# EAGLE board ProjetoGenius (EAGLE 9.7.0)

Size 92.95 x 123.7 mm. Coordinates in mm from the lower left corner, seen from the top.
Outline: 0,0 92.95,0 92.95,123.7 0,123.7 0,0
Copper layers (1*16): Top 0.035mm / dielectric 1.5mm / Bottom 0.035mm
Design rules "default": minimum track width 6mil, minimum drill 0.35mm, track to track 6mil, track to pad 6mil, pad to pad 6mil, via to via 6mil, smd to smd 6mil, copper to edge 40mil, drill to drill 6mil, minimum pad ring 10mil, minimum via ring 8mil, stop-mask expansion 4mil, vias tented up to drill 0mil, thermal gap 10mil

## Footprints (pad centres in the part's own frame; a part is rotated, then mirrored left to right if it is on the bottom)
LEDRD254W60D565H860B = drill 0.981 pad 1.581: 1 -1.27,0; 2 1.27,0
LEDRD254W60D565H860B_B = drill 0.981 pad 1.581: 1 -1.27,0; 2 1.27,0
LEDRD254W60D565H860B_Y = drill 0.981 pad 1.581: 1 -1.27,0; 2 1.27,0
LEDRD254W60D565H860B_G = drill 0.981 pad 1.581: 1 -1.27,0; 2 1.27,0
PIEZO = drill 1 pad 1.6: 1 -3.5,0; 2 3.5,0
RESAD1016W63L850D250B = drill 0.83 pad 1.43: 1 -5.08,0; 2 5.08,0
SWITCH-MOMENTARY-PTH-6.5MM = drill 1.016 pad 1.88: 1 -3.251,2.261; 2 3.251,2.261; 3 -3.251,-2.261; 4 3.251,-2.261
ARDUINO-UNO-R3-SHIELD = drill 1.016 pad 1.88: 3.3V 24.13,-2.54; 5V 24.13,0; A0 24.13,12.7; A1 24.13,15.24; A2 24.13,17.78; A3 24.13,20.32; A4 24.13,22.86; A5 24.13,25.4; AREF -24.13,-13.97; D2 -24.13,20.32; D3 -24.13,17.78; D4 -24.13,15.24; D5 -24.13,12.7; D6 -24.13,10.16; D7 -24.13,7.62; D8 -24.13,3.81; D9 -24.13,1.27; D10 -24.13,-1.27; D11 -24.13,-3.81; D12 -24.13,-6.35; D13 -24.13,-8.89; GND@0 24.13,2.54; GND@1 24.13,5.08; GND@2 -24.13,-11.43; IOREF 24.13,-7.62; NC 24.13,-10.16; RES 24.13,-5.08; RX -24.13,25.4; SCL -24.13,-19.05; SDA -24.13,-16.51; TX -24.13,22.86; VIN 24.13,7.62

## Placement (x,y rotation side)
D1  RED  [LEDRD254W60D565H860B]  24.77,26.42 180 top
D2  BLUE  [LEDRD254W60D565H860B_B]  42.55,26.42 180 top
D3  YELLOW  [LEDRD254W60D565H860B_Y]  57.78,26.42 180 top
D4  GREEN  [LEDRD254W60D565H860B_G]  9.53,26.42 180 top
PIEZO1  PIEZO  [PIEZO]  79.38,35.31 90 top
RR_AMARELO  220  [RESAD1016W63L850D250B]  56.52,36.58 90 top
RR_AZUL  220  [RESAD1016W63L850D250B]  41.27,36.58 90 top
RR_VERDE  220  [RESAD1016W63L850D250B]  8.26,36.58 90 top
RR_VERMELHO  220  [RESAD1016W63L850D250B]  23.5,36.58 90 top
SB_AMARELO  SWITCH_MOMENTARY  [SWITCH-MOMENTARY-PTH-6.5MM]  41.27,7.37 270 top
SB_AZUL  SWITCH_MOMENTARY  [SWITCH-MOMENTARY-PTH-6.5MM]  8.26,7.37 90 top
SB_VERDE  SWITCH_MOMENTARY  [SWITCH-MOMENTARY-PTH-6.5MM]  23.5,7.37 90 top
SB_VERMELHO  SWITCH_MOMENTARY  [SWITCH-MOMENTARY-PTH-6.5MM]  56.52,7.37 270 top
U1  ARDUINO-UNO-R3-SHIELD  [ARDUINO-UNO-R3-SHIELD]  40.86,75.82 180 top

## Library data of the parts
D1 = Tinkercad; CATEGORY: Opto-Electronic; SUB-CATEGORY: LED; VALUE: LED_RED
D2 = Tinkercad; CATEGORY: Opto-Electronic; SUB-CATEGORY: LED; VALUE: LED_BLUE
D3 = Tinkercad; CATEGORY: Opto-Electronic; SUB-CATEGORY: LED; VALUE: LED_YELLOW
D4 = Tinkercad; CATEGORY: Opto-Electronic; SUB-CATEGORY: LED; VALUE: LED_GREEN
PIEZO1 RR_AMARELO RR_AZUL RR_VERDE RR_VERMELHO SB_AMARELO SB_AZUL SB_VERDE SB_VERMELHO U1 = Tinkercad

## Nets
D1_C: D1.2 RR_VERMELHO.1
D2_C: D2.2 RR_AZUL.1
D3_C: D3.2 RR_AMARELO.1
D4_C: D4.2 RR_VERDE.1
U1_D2: D4.1 U1.D2
U1_D3: D1.1 U1.D3
U1_D4: D2.1 U1.D4
U1_D5: D3.1 U1.D5
U1_D7: PIEZO1.1 U1.D7
U1_D8: SB_AZUL.3 SB_AZUL.4 U1.D8
U1_D9: SB_VERDE.3 SB_VERDE.4 U1.D9
U1_D10: SB_AMARELO.1 SB_AMARELO.2 U1.D10
U1_D11: SB_VERMELHO.1 SB_VERMELHO.2 U1.D11
U1_GND: PIEZO1.2 RR_AMARELO.2 RR_AZUL.2 RR_VERDE.2 RR_VERMELHO.2 SB_AMARELO.3 SB_AMARELO.4 SB_AZUL.1 SB_AZUL.2 SB_VERDE.1 SB_VERDE.2 SB_VERMELHO.3 SB_VERMELHO.4 U1.GND@0 U1.GND@1 U1.GND@2

## Tracks (layer width: path | path; a pad name or v marks a point on that pad's centre or on a via)
D1_C  (1 unrouted)
D2_C  (1 unrouted)
D3_C  (1 unrouted)
D4_C  (1 unrouted)
U1_D2  (1 unrouted)
U1_D3  (1 unrouted)
U1_D4  (1 unrouted)
U1_D5  (1 unrouted)
U1_D7  (1 unrouted)
U1_D8  (2 unrouted)
U1_D9  (2 unrouted)
U1_D10  (2 unrouted)
U1_D11  (2 unrouted)
U1_GND  (15 unrouted)